# EAGLE board thompson (EAGLE 9.6.2)
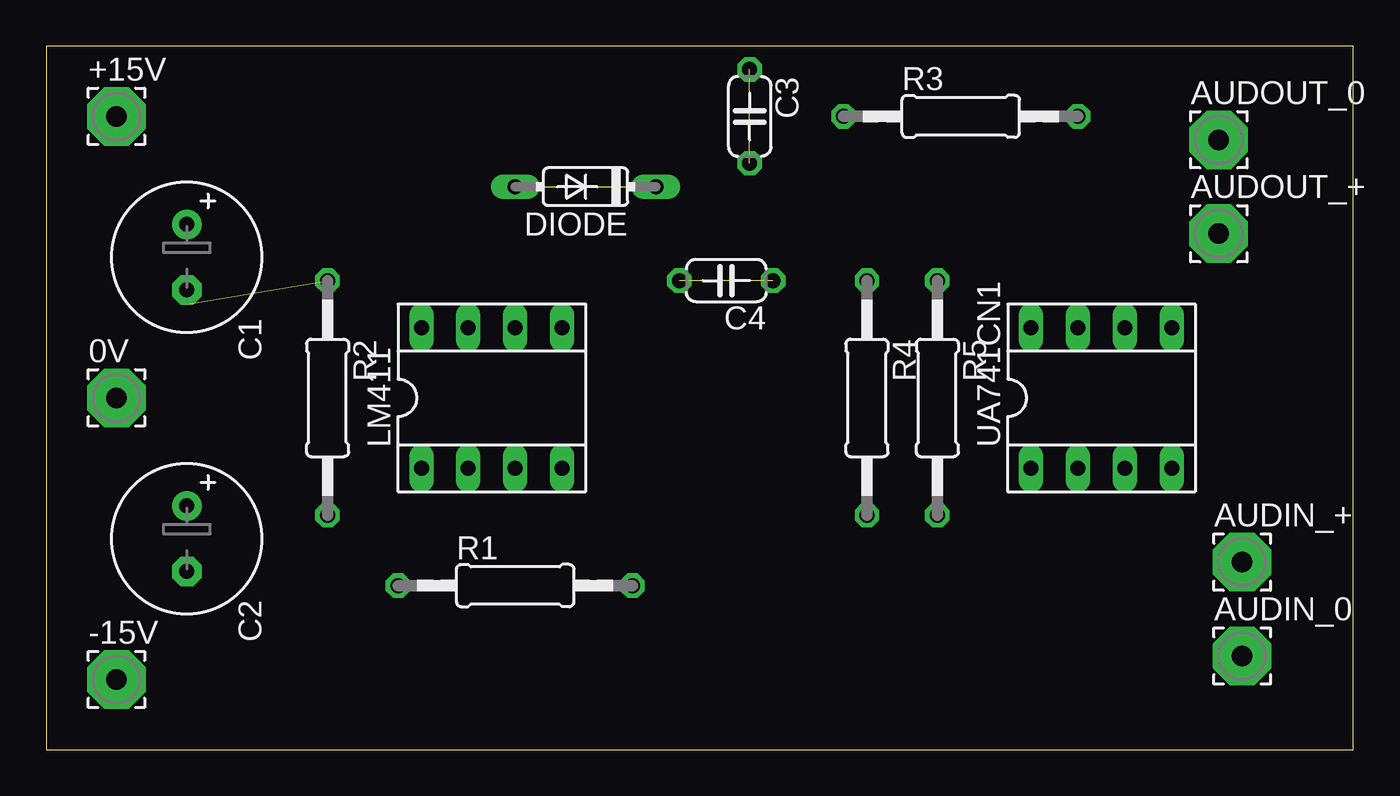
[diagram p0: board, top side]
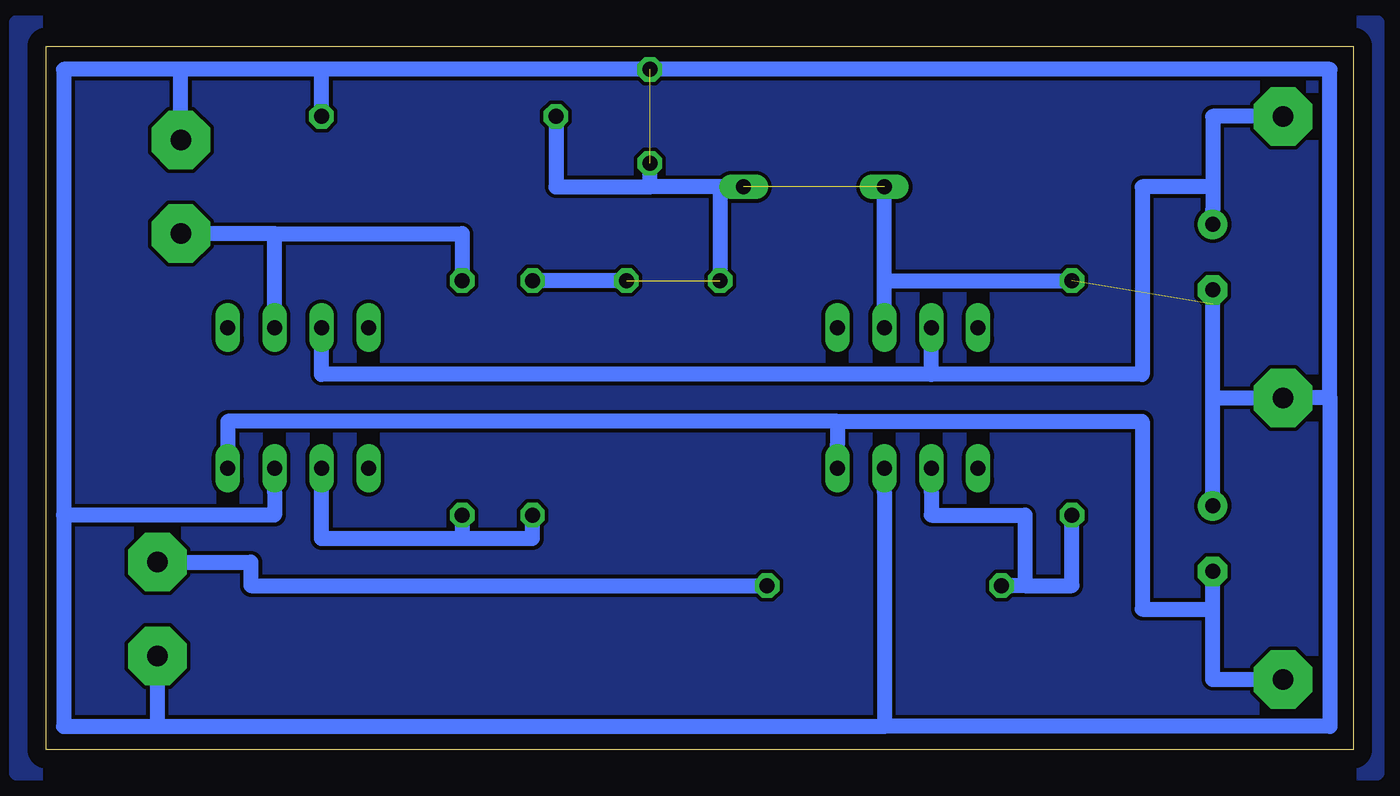
[diagram p1: board, bottom side, seen from below]

Size 70.79 x 38.09 mm. Coordinates in mm from the lower left corner, seen from the top.
Outline: 0,0 70.79,0 70.79,38.09 0,38.09 0,0
Copper layers (1*16): Top 0.035mm / dielectric 1.5mm / Bottom 0.035mm
Design rules "default": minimum track width 10mil, minimum drill 24mil, track to track 8mil, track to pad 8mil, pad to pad 8mil, via to via 8mil, smd to smd 8mil, copper to edge 40mil, drill to drill 8mil, minimum pad ring 10mil, minimum via ring 8mil, stop-mask expansion 4mil, vias tented up to drill 0mil, thermal gap 10mil

## Footprints (pad centres in the part's own frame; a part is rotated, then mirrored left to right if it is on the bottom)
3,17/1,1 = drill 1.118 pad 3.175 octagon: 1 0,0
E3,5-8 = drill 0.813 pad 1.6: + -1.778,0 | drill 0.813 pad 1.6 octagon: - 1.778,0
C050-024X044 = drill 0.813 octagon: 1 -2.54,0; 2 2.54,0
DO35-7A = drill 0.813 long: A 3.81,0; C -3.81,0
SOCKET-08 = drill 0.813 long: 1 -3.81,-3.81; 2 -1.27,-3.81; 3 1.27,-3.81; 4 3.81,-3.81; 5 3.81,3.81; 6 1.27,3.81; 7 -1.27,3.81; 8 -3.81,3.81
0207/12 = drill 0.813 octagon: 1 -6.35,0; 2 6.35,0

## Placement (x,y rotation side)
0V  [3,17/1,1]  3.81,19.05 0 top
+15V  [3,17/1,1]  3.81,34.29 0 top
-15V  [3,17/1,1]  3.81,3.81 0 top
AUDIN_0  [3,17/1,1]  64.77,5.08 0 top
AUDIN_+  [3,17/1,1]  64.77,10.16 0 top
AUDOUT_0  [3,17/1,1]  63.5,33.02 0 top
AUDOUT_+  [3,17/1,1]  63.5,27.94 0 top
C1  [E3,5-8]  7.62,26.67 270 top
C2  [E3,5-8]  7.62,11.43 270 top
C3  [C050-024X044]  38.1,34.29 270 top
C4  [C050-024X044]  36.83,25.4 180 top
DIODE  [DO35-7A]  29.21,30.48 180 top
LM411  LM411  [SOCKET-08]  24.13,19.05 0 top
R1  [0207/12]  25.4,8.89 0 top
R2  [0207/12]  15.24,19.05 270 top
R3  [0207/12]  49.53,34.29 0 top
R4  [0207/12]  44.45,19.05 270 top
R5  [0207/12]  48.26,19.05 270 top
UA741CN1  UA741CN  [SOCKET-08]  57.15,19.05 0 top

## Library data of the parts
0V +15V -15V AUDIN_0 AUDIN_+ AUDOUT_0 AUDOUT_+ = wirepad
C1-C4 = rcl
DIODE = diode
LM411 UA741CN1 = ic-package
R1-R5 = resistor

## Nets
S$1: +15V.1
S$2: R5.1
S$3: R1.1 R2.2
S$4: -15V.1
S$5: R4.2 R5.2
S$6: R1.2
S$8: 0V.1 C3.1 C3.2 C4.1 C4.2 DIODE.A DIODE.C R2.1 R3.1 R3.2 R4.1

## Tracks (layer width: path | path; a pad name or v marks a point on that pad's centre or on a via)
GND
  pour Bottom: -1.27,-1.27 72.39,-1.27 72.39,39.37 -1.27,39.37
S$1
  Bottom 0.813: +15V.1 7.62,34.29 7.62,30.48 | 7.62,30.48 7.62,29.21 | 7.62,30.48 11.43,30.48 11.43,20.32 22.86,20.32 | 22.86,20.32 22.86,21.59 | 22.86,20.32 55.88,20.32 55.88,21.59
S$2
  Bottom 0.813: 58.42,24.13 58.42,27.94 | 58.42,27.94 62.23,27.94 | 58.42,27.94 48.26,27.94 R5.1
S$3
  Bottom 0.813: 22.86,13.97 22.86,12.7 17.78,12.7 17.78,8.89 | 17.78,8.89 R1.1 | 17.78,8.89 15.24,8.89 R2.2
S$4
  Bottom 0.813: 27.94,17.78 11.43,17.78 11.43,7.62 7.62,7.62 | -15V.1 7.62,3.81 7.62,7.62 | 7.62,7.62 7.62,8.89 | 27.94,17.78 27.94,16.51 | 27.94,17.78 60.96,17.78 60.96,16.51
S$5
  Bottom 0.813: R4.2 44.45,11.43 48.26,11.43 | 48.26,11.43 49.53,11.43 55.88,11.43 55.88,13.97 | R5.2 48.26,11.43
S$6
  Bottom 0.813: 63.5,10.16 59.69,10.16 59.69,8.89 R1.2
S$8  (4 unrouted)
  Bottom 0.813: 58.42,13.97 58.42,12.7 69.85,12.7 | R3.1 43.18,30.48 38.1,30.48 | 34.29,30.48 38.1,30.48 | 7.62,13.97 7.62,19.05 | 7.62,19.05 0V.1 1.27,19.05 | 1.27,19.05 1.27,36.83 55.88,36.83 | 55.88,36.83 63.5,36.83 | 63.5,36.83 69.85,36.83 69.85,12.7 | 69.85,12.7 69.85,1.27 64.77,1.27 | 1.27,19.05 1.27,1.27 25.4,1.27 | 64.77,1.27 25.4,1.27 | 64.77,3.81 64.77,1.27 | 25.4,13.97 25.4,1.27 | 38.1,30.48 C3.2 | 25.4,24.13 25.4,25.4 | 25.4,25.4 R2.1 | R3.2 55.88,36.83 | 34.29,30.48 C4.2 | 63.5,34.29 63.5,36.83 | 7.62,19.05 7.62,24.13 | 25.4,25.4 DIODE.A | DIODE.C 34.29,30.48 | C4.1 R4.1